# Altium PCB MP3_GIT.PcbDoc (part 2 of 2)
Units mm, origin at the board's own origin, x right, y up, seen from the top; angles counter-clockwise.
Board outline 55.37 x 101.47 mm, 4 copper layers (Top Layer, Int1 (GND), Int2 (PWR), Bottom Layer), stack 1.571 mm thick; 90 components, 60 nets, 372 pads, 171 vias.
Unrouted connection lines stored in the file: 1.
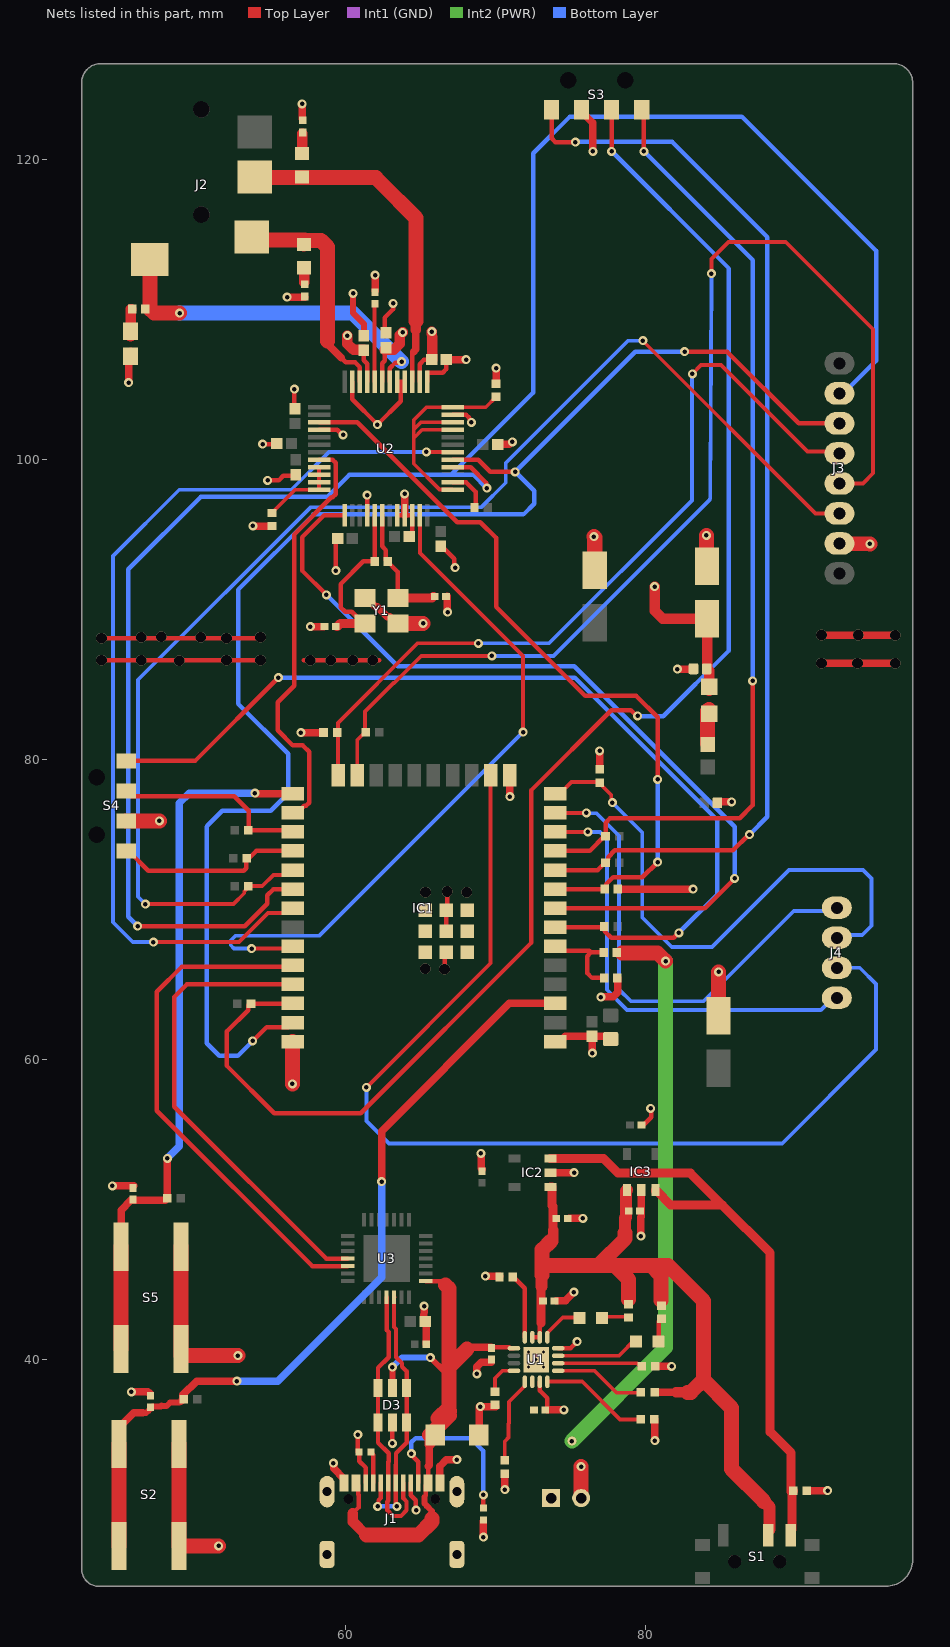
[diagram p4: the nets of this part, all layers, seen from the top]

## Via types
v1: diameter 0.6, hole 0.3, Top Layer to Bottom Layer, 140 vias
v2: diameter 0.711, hole 0.711, Top Layer to Bottom Layer, 26 vias
v3: diameter 0.5, hole 0.2, Top Layer to Bottom Layer, tented top, 5 vias

## Nets (pads, with @x,y where several pads share a name; then routed paths per layer and width w, separated by ;. In a path a pad name is that pad's centre, name@x,y a point inside that pad or via, vN(x,y) a via of type N, cw(c..) or ccw(c..) an arc to the next point about the centre after c; other vN are vias at no path point) (continued)
+5V: C8.1 D3.5 D4.1 J1.A4_B9 J1.B4_A9 U1.13 U3.8 | length 40.3
  Top Layer w0.286: 60.477,29.743 60.872,30.138 60.872,30.982 60.85,31.004 60.85,31.624 J1.A4_B9@60.694,31.781
  Top Layer w0.3: 65.259,30.836 65.344,30.921 65.344,31.631 J1.B4_A9@65.494,31.781 65.507,31.794 65.507,32.893 ; U3.8@65.328,45.236 66.397,45.236 66.675,44.958 ; C8.1@69.698,40.81 70.9,40.81 70.955,40.755 U1.13@71.22,40.755
  Top Layer w0.4: D3.5@63.119,38.107 v1(63.119,39.497) ; 65.259,30.836 65.259,30.413 65.41,30.262 65.41,30.254 65.761,29.903 65.761,29.413 ; v1(65.659,40.132) 66.599,39.192 ; 66.777,36.957 66.904,36.83
  Top Layer w0.5: 65.507,32.893 65.565,32.951 65.565,34.615 D4.1@65.604,34.654 ; D4.1@65.897,35.533 65.903,35.526 D4.1@65.903,34.517 ; 68.097,40.691 cw(c68.421,40.31) 68.42,40.81 C8.1@69.698,40.81
  Top Layer w0.7: 60.477,29.743 60.477,29.21 61.392,28.296 ; D4.1@65.602,34.356 D4.1@65.602,34.966
  Top Layer w1: 61.392,28.296 64.846,28.296 65.761,29.21 65.761,29.413 ; D4.1@65.604,34.966 66.925,36.287 ; 66.163,36.089 66.904,36.83 66.904,39.497 ; 66.296,35.956 66.925,36.585 ; 66.675,44.958 66.904,44.729 66.904,39.497 ; 68.097,40.691 66.904,39.497
  Bottom Layer w0.4: v1(63.119,39.497) 63.122,39.497 63.757,40.132 v1(65.659,40.132)
+AVDD: C10.2 C12.2 C13.2 C14.1 C15.2 R12.2 U2.38 U2.43 U2.45 | length 22.4
  Top Layer w0.3: C13.2@61.214,107.297 61.214,106.591 61.437,106.367 U2.45@61.437,105.161 ; U2.43@62.437,105.161 62.437,106.392 62.611,106.566 C15.2@62.611,107.297 ; U2.38@64.937,105.161 64.937,106.339 65.228,106.629 C12.2@65.768,106.629
  Top Layer w0.7: v1(60.122,108.229) 60.122,107.707 60.532,107.297 C13.2@61.214,107.297 ; C15.2@62.611,107.297 63.217,107.297 63.602,107.681 63.602,108.253 v1(63.8,108.452) ; v1(65.761,108.509) 65.768,107.987 cw(c65.068,107.978) 65.768,107.978 C12.2@65.768,106.629 ; v1(80.602,91.503) 80.594,91.496 80.594,89.891 81.125,89.36 C14.1@84.099,89.36 84.099,86.03 84.226,85.903 R12.2@84.226,84.574
+VBAT: C11.1 P1.1 R18.2 U1.2 | length 37.7
  Top Layer w1: 78.41,67.081 80.797,67.081 v1(81.331,66.548)
  Int2 (PWR) w1: v1(75.082,34.569) 81.331,40.818 v1(81.331,66.548)
+VOUT: C7.1 C27.1 C28.1 IC2.1 IC3.1 R4.2 R6.2 R10.1 S1.2 U1.10 U1.11 | length 54.4
  Top Layer w0.3: U1.11@72.445,41.48 U1.10@72.945,41.48 72.945,42.44
  Top Layer w0.5: R10.1@80.662,37.821 82.042,37.821
  Top Layer w0.6: 73.041,42.434 73.041,44.847 73.05,44.856 ; IC2.1@73.666,51.501 73.741,51.501 73.766,51.476 73.766,50.276 73.83,50.212 73.83,48.624 73.838,48.616
  Top Layer w0.7: 73.685,47.904 73.838,48.057 73.838,48.616 ; 82.042,37.821 82.779,37.821
  Top Layer w0.8: 73.05,44.856 73.05,45.593 73.101,45.644 ; 78.638,48.438 78.638,49.438 78.68,49.479 78.68,51.226 IC3.1@78.755,51.302 ; 87.867,30.56 88.253,30.173 S1.2@88.253,28.674
  Top Layer w1: 73.101,45.644 73.101,46.279 ; 73.685,47.904 73.101,47.32 73.101,46.279 ; 78.638,48.438 78.638,48.057 76.86,46.279 ; 78.867,43.993 78.867,45.339 77.927,46.279 ; 81.026,43.942 81.026,45.593 80.34,46.279 ; 82.779,37.821 83.007,37.821 83.845,38.659 ; 87.867,30.56 87.867,30.574 85.725,32.715 85.725,36.779 83.845,38.659 ; 73.101,46.279 76.86,46.279 ; 76.86,46.279 77.927,46.279 ; 77.927,46.279 80.34,46.279 ; 80.34,46.279 81.483,46.279 83.845,43.917 83.845,38.659
AUDIO_GBUF: J2.1 R25.2 U2.42 | length 23.4
  Top Layer w0.3: U2.42@62.937,105.161 62.937,106.056 63.326,106.445 63.671,106.445 v1(63.729,106.502)
  Top Layer w1: J2.1@46.944,113.307 46.965,113.286 46.965,110.007 47.244,109.728 v1(48.946,109.728)
  Bottom Layer w1: v1(48.946,109.728) 60.503,109.728 v1(63.729,106.502)
AUDIO_LEFT: J2.2 R27.1 U2.46 | length 15.6
  Top Layer w0.3: 59.715,106.756 60.02,106.451 60.63,106.451 60.937,106.144 U2.46@60.937,105.161
  Top Layer w0.5: 58.801,107.874 58.801,107.671 59.715,106.756
  Top Layer w0.7: J2.2@53.744,114.807 J2.2@53.957,114.593 ; R27.1@57.196,114.212 R27.1@57.221,114.187
  Top Layer w1: J2.2@53.957,114.593 R27.1@57.252,114.593 ; R27.1@57.277,114.568 58.37,114.568 58.801,114.137 58.801,107.874
AUDIO_RIGHT: J2.3 R26.1 U2.39 | length 22.9
  Top Layer w0.3: U2.39@64.437,105.161 64.437,107.064 64.533,107.16
  Top Layer w0.5: 64.533,107.16 64.694,107.321 64.694,108.636
  Top Layer w0.7: 64.694,108.636 64.694,109.22
  Top Layer w1: J2.3@53.944,118.807 53.993,118.757 57.15,118.757 62.015,118.757 62.308,118.464 64.694,116.078 64.694,109.22
BAT_LEVEL: IC1.6 R18.1 R20.2 | length 6.1
  Top Layer w0.3: IC1.6@73.973,67.542 74.273,67.242 76.242,67.242 76.352,67.132 ; R18.1@77.191,67.132 76.352,67.132 ; R20.2@77.221,65.43 76.429,65.43 76.098,65.761 76.098,66.878 76.352,67.132
BOOT: C34.1 IC1.25 R34.1 S5.1 S5.3 | length 47.2
  Top Layer w0.5: S5.3@45.041,47.52 45.041,49.959 45.695,50.613 47.983,50.613 48.066,50.695 48.066,50.698 48.114,50.747 48.114,53.397 v1(48.133,53.416) ; v1(53.95,77.749) 53.977,77.749 54.024,77.702 IC1.25@56.473,77.702
  Top Layer w1: S5.1@45.041,40.72 S5.3@45.041,47.52
  Bottom Layer w0.5: v1(48.133,53.416) 48.92,54.204 48.92,77.089 49.581,77.749 v1(53.95,77.749)
GND: C1.1 C2.2 C3.1 C4.1 C5.1 C6.1 C7.2 C8.2 C9.1 C10.1 C11.2 C12.1 C13.1 C14.2 C15.1 C16.1 C17.1 C18.2 C19.1 C20.2 C21.2 C22.2 C23.1 C24.1 C25.1 C26.2 C27.2 C28.2 C29.2 C30.2 C31.1 C32.1 C33.2 C34.2 D3.2 D4.2 IC1.1 IC1.15 IC1.38 IC1.39 IC1.40 IC1.41 IC1.42 IC1.43 IC1.44 IC1.45 IC1.46 IC1.47 IC2.2 IC3.2 J1.A1_B12 J1.A8 J1.B1_A12 J1.B8 J1.SH1 J1.SH2 J1.SH3 J1.SH4 J3.2 P1.2 R1.2 R2.1 R3.1 R5.1 R8.1 R9.1 R11.2 R13.2 R14.1 R15.1 R16.1 R19.1 R20.1 R24.2 S2.2 S2.4 S3.C1 S4.C1 S5.2 S5.4 U1.3 U1.8 U1.17 U2.4 U2.16 U2.20 U2.21 U2.22 U2.35 U2.37 U2.40 U2.41 U2.47 Y1.2 Y1.4 | length 188.9
  Top Layer w0.3: v2@43.612,88.062 v2(43.739,88.062) v2(52.07,88.062) v2@54.331,88.062 ; v2(43.739,86.614) v2(46.38,86.614) v2(52.07,86.614) v2(54.331,86.614) ; v1(54.467,101.013) 55.19,101.013 C25.1@55.19,101.027 ; v1(54.813,98.589) 54.828,98.604 55.563,98.604 55.856,98.897 C4.1@56.667,98.897 ; C3.1@56.591,103.211 v1(56.591,104.673) ; 57.226,86.614 62.255,86.614 ; U2.4@58.237,101.961 59.437,101.961 59.773,101.625 v1(59.842,101.625) ; v1(59.355,92.583) 59.355,94.507 59.504,94.697 C24.1@59.519,94.717 ; U2.47@60.437,105.161 60.437,104.002 v1(62.128,102.311) 63.687,103.87 63.687,105.161 ; R5.1@60.809,33.835 60.813,33.839 60.813,34.999 v1(60.817,35.003) ; R5.1@60.817,33.835 R5.1@60.903,33.749 ; R5.1@60.919,33.747 60.919,33.23 61.344,32.806 J1.B8@61.344,31.781 ; U2.16@61.437,96.261 61.437,97.607 v1(61.443,97.612) ; C15.1@62.611,108.197 62.597,108.211 62.597,109.434 63.17,110.007 v1(63.17,110.388) ; v1(63.119,34.417) D3.2@63.119,35.807 ; U2.20@63.437,96.261 U2.21@63.937,96.261 U2.22@64.437,96.261 64.437,95.054 C23.1@64.346,94.844 ; U2.41@63.437,105.161 63.687,105.161 ; U2.40@63.937,105.161 63.687,105.161 ; J1.A8@64.344,31.781 64.344,30.967 64.68,30.63 64.68,30.002 v1(64.71,29.972) ; U2.37@65.437,105.161 65.437,105.761 66.469,105.761 66.72,106.012 66.72,106.629 C12.1@66.72,106.647 ; C6.1@66.345,94.241 66.37,94.241 67.253,93.358 67.253,92.834 v1(67.31,92.777) ; v2(66.599,66.015) 66.599,67.008 IC1.46@66.723,67.132 ; IC1.39@66.723,68.532 IC1.43@66.723,69.932 66.777,69.986 v2(66.777,71.196) ; U2.35@67.137,102.961 68.032,102.961 68.237,102.756 68.237,102.685 68.387,102.535 v1(68.387,102.454) ; U1.3@72.945,38.53 72.955,38.52 72.955,37.916 73.431,37.44 C11.2@73.431,36.652 ; U1.8@74.17,40.755 74.994,40.755 v1(75.438,41.199) ; C29.2@79.842,55.626 80.366,56.15 80.366,56.709 v1(80.331,56.744)
  Top Layer w0.4: v1(60.503,111.049) 60.503,109.728 61.214,109.017 C13.1@61.214,108.237 C13.1@61.214,108.197
  Top Layer w0.5: v1@44.45,51.562 v1(44.459,51.571) 44.467,51.579 C34.2@45.898,51.579 ; v1(45.542,105.105) 45.542,106.54 C30.2@45.669,107.196 ; v1(45.729,37.855) 46.825,37.855 46.882,37.797 46.904,37.797 46.99,37.711 C33.2@46.99,37.69 ; v1(53.823,95.555) 53.835,95.542 55.08,95.542 R16.1@55.093,95.529 ; v1(56.109,110.795) 56.112,110.799 57.273,110.799 C31.1@57.277,110.802 ; v1(57.023,81.788) R24.2@58.48,81.788 ; C32.1@57.099,122.674 v1(57.099,123.673) ; v1(57.658,88.849) C20.2@58.532,88.834 ; v1(59.182,33.096) 59.201,33.077 59.201,32.748 59.894,32.056 J1.A1_B12@59.894,31.781 ; Y1.2@61.282,90.766 61.382,90.766 61.982,90.166 62.119,90.166 62.775,89.51 62.939,89.51 63.382,89.066 Y1.4@63.482,89.066 ; C1.1@61.976,111.223 v1(61.976,112.266) ; v1(63.932,97.688) 63.935,97.686 63.935,96.264 U2.21@63.937,96.261 ; C19.1@65.22,42.57 v1(65.243,43.561) ; C19.1@65.298,42.545 65.369,42.474 C18.2@65.369,41.022 ; J1.B1_A12@66.294,31.781 66.294,32.893 66.718,33.317 67.392,33.317 v1(67.412,33.337) ; C12.1@66.72,106.629 v1(68.032,106.629) ; C21.2@66.779,90.856 66.791,90.844 66.791,89.826 v1(66.802,89.814) ; v1(68.758,39.04) 68.758,39.517 69.051,39.81 C8.2@69.698,39.81 ; D4.2@68.864,35.264 68.916,35.317 68.916,36.862 v1@68.936,36.881 ; v1(68.983,36.869) R9.1@69.999,36.869 ; v1(69.012,53.742) 69.031,53.723 69.031,52.747 C26.2@69.037,52.741 ; C26.2@69.088,52.668 C26.2@69.113,52.693 ; v1(69.19,28.169) R2.1@69.19,29.218 ; v1(69.317,45.568) R3.1@70.282,45.568 ; R14.1@70.028,105.049 v1(70.028,106.07) ; C5.1@70.104,100.99 C5.1@70.129,100.99 70.922,100.99 71.093,101.162 v1(71.12,101.162) ; v1(70.612,31.333) R11.2@70.612,32.339 ; IC1.15@70.938,78.952 70.94,78.95 70.94,77.523 v1(70.942,77.521) ; C11.2@73.431,36.652 v1(74.549,36.652) ; IC2.2@73.666,52.451 v1(75.235,52.451) ; IC1.1@73.973,61.192 74.273,61.192 74.632,61.551 76.454,61.551 C17.1@76.454,61.537 ; C7.2@74.041,43.917 74.676,43.917 74.676,43.94 75.209,44.474 v1(75.209,44.501) ; C27.2@74.922,49.403 v1(75.819,49.403) ; S3.C1@75.738,123.297 75.738,123.147 76.479,122.406 v1(76.479,120.513) ; C17.1@76.429,61.537 C17.1@76.454,61.537 ; v1(76.454,60.427) C17.1@76.454,61.537 ; R19.1@76.937,79.4 v1(76.937,80.569) ; v1(77.013,64.16) 77.028,64.175 77.832,64.175 78.125,64.468 R20.1@78.125,65.43 ; C16.1@77.428,61.537 C17.1@76.454,61.537 ; R15.1@78.151,71.349 v1(83.16,71.349) ; v1(79.68,48.235) 79.68,49.479 79.705,49.505 IC3.2@79.705,51.302 ; R13.2@80.615,36.017 80.617,36.015 80.617,34.597 v1(80.62,34.595) ; R8.1@80.641,39.548 v1(81.737,39.548) ; v1(82.118,86.004) 82.131,86.017 83.137,86.017 C10.1@83.149,86.03 ; C9.1@84.948,77.165 v1(85.725,77.165) ; R1.2@90.801,31.246 90.813,31.259 92.113,31.259 v1(92.126,31.271) ; v2(91.713,86.411) v2(94.113,86.411) v2(96.622,86.411) ; v2(91.713,88.29) 91.726,88.278 94.158,88.278 ccw(c94.162,88.728) 94.16,88.278 v2(96.622,88.265)
  Top Layer w1: S4.C1@45.384,75.891 47.595,75.891 v1(47.6,75.895) ; S2.4@48.914,34.388 S2.2@48.914,27.588 51.533,27.588 v1(51.537,27.584) ; S5.4@49.041,47.52 49.041,40.259 v1(52.832,40.259) ; v1(56.464,58.369) 56.473,58.378 IC1.38@56.473,61.192 ; Y1.4@63.482,89.066 63.496,89.052 v1(65.176,89.052) ; v1(75.692,32.868) 75.701,32.858 P1.2@75.701,30.771 ; v1(76.556,94.844) 76.606,94.793 C22.2@76.606,92.603 ; v1(84.049,94.92) 84.049,92.911 C14.2@84.099,92.86 ; C2.2@84.861,62.913 v1(84.861,65.837) ; J3.2@92.913,94.386 93.163,94.386 v1(94.945,94.361)
  Int1 (GND) w0.3: v3(72.695,40.005) v3(73.195,40.505)
  other v2: 65.303,66.04 65.329,71.145 68.072,71.145 48.92,86.563 57.658,86.614 59.008,86.614 60.482,86.614 61.806,86.614 46.38,88.138 50.343,88.138 54.331,88.138 47.727,88.163 94.158,88.29
  other v3: 72.195,39.505 73.195,39.505 72.195,40.505
NetC1_2: C1.2 U2.44 | length 5.1
  Top Layer w0.254: U2.44@61.937,105.161 61.937,107.013 61.934,107.016 61.934,110.223 C1.2@61.976,110.265
NetC20_1: C20.1 R17.1 U2.17 Y1.3 | length 11.6
  Top Layer w0.3: Y1.3@61.282,89.066 61.182,89.066 60.409,89.84 59.969,89.84 59.665,90.145 59.665,91.669 61.189,93.193 61.976,93.193 61.937,93.231 U2.17@61.937,96.261
  Top Layer w0.6: C20.1@59.436,88.849 59.653,89.066 Y1.3@61.282,89.066
NetC21_1: C21.1 R17.2 U2.18 Y1.1 | length 8.3
  Top Layer w0.3: U2.18@62.437,96.261 62.437,94.197 62.692,93.943 62.692,93.281 63.482,92.49 Y1.1@63.482,90.766
  Top Layer w0.6: Y1.1@63.482,90.766 65.77,90.766 C21.1@65.859,90.856
NetC30_1: C30.1 R25.1 | length 1.8
  Top Layer w0.7: C30.1@45.669,108.196 45.669,108.508 45.688,108.526 45.688,109.989 R25.1@45.706,110.007
NetC31_2: C31.2 R27.2 | length 1
  Top Layer w0.7: C31.2@57.252,111.778 R27.2@57.252,112.758
NetC32_2: C32.2 R26.2 | length 1.4
  Top Layer w0.7: R26.2@57.099,120.308 C32.2@57.099,121.674
NetD1_A: D1.A R4.1 | length 1.7
  Top Layer w0.254: D1.A@77.204,42.799 77.262,42.857 R4.1@78.867,42.857
NetD1_C: D1.C U1.9 | length 3
  Top Layer w0.254: U1.9@73.445,41.48 73.445,41.765 74.479,42.799 D1.C@75.704,42.799
NetD2_1: D2.1 R6.1 | length 1.6
  Top Layer w0.3: D2.1@80.862,41.199 80.862,42.559 81.024,42.721 R6.1@81.044,42.721
NetD2_2: D2.2 U1.7 | length 5.7
  Top Layer w0.254: U1.7@74.17,40.255 78.215,40.255 D2.2@79.362,41.402
NetJ1_A5: J1.A5 R5.2 | length 2.1
  Top Layer w0.3: R5.2@61.637,33.835 R5.2@61.645,33.835 ; R5.2@61.661,33.833 61.844,33.65 J1.A5@61.844,31.781
NetJ1_B5: J1.B5 R2.2 | length 12
  Top Layer w0.3: v1(64.389,33.731) 64.389,33.65 64.844,33.195 J1.B5@64.844,31.781 ; R2.2@69.19,30.12 v1(69.19,30.988)
  Bottom Layer w0.3: v1(64.389,33.731) 64.389,34.493 64.668,34.773 68.326,34.773 69.164,33.934 69.164,31.013 v1(69.19,30.988)
NetL1_2: L1.2 R12.1 | length 2.3
  Top Layer w1: L1.2@84.125,81.065 84.125,83.218 R12.1@84.226,83.32
NetR3_2: R3.2 U1.12 | length 4.4
  Top Layer w0.3: R3.2@71.182,45.568 71.182,45.518 71.945,44.755 U1.12@71.945,41.48
NetR7_1: R7.1 U2.26 | length 2.8
  Top Layer w0.3: U2.26@67.137,98.461 68.032,98.461 68.661,97.832 R7.1@68.661,96.799
NetR8_2: R8.2 U1.6 | length 5.6
  Top Layer w0.254: U1.6@74.17,39.755 79.428,39.755 79.633,39.549 R8.2@79.633,39.548
NetR9_2: R9.2 U1.16 | length 2.5
  Top Layer w0.254: R9.2@69.952,37.781 69.952,38.76 70.441,39.25 71.215,39.25 U1.16@71.22,39.255
NetR10_2: R10.2 U1.5 | length 6.1
  Top Layer w0.254: U1.5@74.17,39.255 76.594,39.255 78.054,37.795 79.629,37.795 R10.2@79.654,37.821
NetR11_1: R11.1 U1.1 | length 5.7
  Top Layer w0.254: R11.1@70.612,33.346 70.612,34.548 70.862,34.798 70.862,35.729 70.891,35.759 70.891,37.192 71.945,38.245 U1.1@71.945,38.53
NetR13_1: R13.1 U1.4 | length 7.2
  Top Layer w0.254: U1.4@73.445,38.53 75.77,38.53 78.283,36.017 R13.1@79.608,36.017
NetR14_2: R14.2 U2.25 U2.33 U2.34 U2.36 | length 18
  Top Layer w0.254: U2.25@67.137,97.961 67.114,97.984 66.252,97.984 64.541,99.694 64.541,101.397 ; U2.33@67.137,101.961 65.106,101.961 64.541,101.397 ; U2.34@67.137,102.461 65.021,102.461 64.541,101.981 ; R14.2@70.028,104.145 70.026,104.145 69.342,103.461 U2.36@67.137,103.461 65.386,103.461 64.541,102.616 64.541,101.981 ; 64.541,101.397 64.541,101.981
NetR16_2: R16.2 U2.9 U2.10 U2.11 U2.12 | length 5.3
  Top Layer w0.254: R16.2@55.093,96.434 55.095,96.434 56.622,97.961 U2.12@58.237,97.961 U2.11@58.237,98.461 U2.10@58.237,98.961 U2.9@58.237,99.461
ONandOFF: IC2.3 IC3.3 R1.1 S1.3 | length 41.2
  Top Layer w0.6: IC2.3@73.666,53.401 77.188,53.401 78.163,52.426 82.982,52.426 85.115,50.292 ; IC3.3@80.655,51.302 80.655,51.227 80.68,51.202 80.755,51.202 81.665,50.292 85.115,50.292 ; R1.1@89.687,31.21 89.687,33.782 88.29,35.179 88.29,47.117 85.115,50.292 ; S1.3@89.753,28.674 89.753,31.154 R1.1@89.845,31.246
RESET: C33.1 IC1.3 R23.1 S2.1 S2.3 | length 54.6
  Top Layer w0.4: 46.496,36.445 46.703,36.445 46.832,36.575 46.854,36.575 46.99,36.711 C33.1@46.99,36.732 ; C33.1@46.99,36.754 47.126,36.89 47.687,36.89 47.738,36.94 47.772,36.906 48.082,36.906 48.302,37.126 48.949,37.126 49.082,37.258 R23.1@49.082,37.262
  Top Layer w0.5: S2.3@44.914,34.388 44.914,35.488 45.871,36.445 46.496,36.445 ; R23.1@49.082,37.262 49.164,37.344 49.164,37.643 50.079,38.557 v1(52.756,38.557) ; v1(62.408,51.867) 62.408,55.22 70.92,63.732 IC1.3@73.973,63.732
  Top Layer w1: S2.1@44.914,27.588 S2.3@44.914,34.388
  Bottom Layer w0.5: v1(52.756,38.557) 55.474,38.557 62.408,45.491 v1(62.408,51.867)
RXD: IC1.34 U3.26 | length 34.7
  Top Layer w0.3: IC1.34@56.473,66.272 56.393,66.192 49.098,66.192 47.422,64.516 47.422,56.591 57.777,46.236 U3.26@60.148,46.236
SD_CS: IC1.12 J4.1 | length 29.9
  Top Layer w0.254: IC1.12@73.973,75.162 73.976,75.159 v1(76.149,75.159)
  Bottom Layer w0.254: v1(76.149,75.159) 76.962,75.159 77.419,74.701 77.419,64.643 78.765,63.297 91.673,63.297 92.485,64.11 J4.1@92.735,64.11
SD_MISO: IC1.14 J4.3 R19.2 | length 37.7
  Top Layer w0.254: IC1.14@73.973,77.702 74.273,77.702 75.057,78.486 76.844,78.486 76.937,78.393 76.94,78.393 77.709,77.625 77.709,77.181 v1(77.775,77.114)
  Bottom Layer w0.254: v1(77.775,77.114) 79.773,75.116 79.773,69.452 81.737,67.488 84.43,67.488 89.56,72.619 94.488,72.619 95.047,72.06 95.047,68.91 94.437,68.301 92.926,68.301 J4.3@92.735,68.11
SD_MOSI: IC1.16 J4.2 | length 71.1
  Top Layer w0.254: v1(61.392,58.141) 69.668,66.417 IC1.16@69.668,78.952
  Bottom Layer w0.254: v1(61.392,58.141) 61.392,55.905 62.89,54.407 89.103,54.407 95.352,60.655 95.352,65.024 94.266,66.11 J4.2@92.735,66.11
SD_SCK: IC1.13 J4.4 | length 32.5
  Top Layer w0.254: IC1.13@73.973,76.432 73.976,76.429 v1(76.048,76.429)
  Bottom Layer w0.254: v1(76.048,76.429) 76.068,76.408 76.729,76.408 78.232,74.905 78.232,64.668 79.019,63.881 83.845,63.881 89.865,69.901 92.527,69.901 J4.4@92.735,70.11
SWITCH_LEFT: IC1.7 R33.1 S4.2 | length 62.9
  Top Layer w0.3: S4.2@45.384,79.891 49.97,79.891 v1(55.524,85.446) ; IC1.7@73.973,68.812 R33.1@77.101,68.812 ; R33.1@77.278,68.828 77.278,68.529 77.697,68.11 81.863,68.11 82.188,68.436 v1(82.215,68.436)
  Bottom Layer w0.3: v1(55.524,85.446) 75.29,85.446 84.785,75.95 84.785,71.006 v1(82.215,68.436)
SWITCH_PUSH: IC1.27 R32.1 S4.T1 | length 13
  Top Layer w0.3: S4.T1@45.384,77.891 45.729,77.546 52.578,77.546 53.56,76.564 53.56,75.286 56.349,75.286 IC1.27@56.473,75.162
SWITCH_RIGHT: IC1.28 R31.1 S4.1 | length 12.5
  Top Layer w0.3: S4.1@45.384,73.891 45.534,73.891 46.857,72.568 53.216,72.568 53.392,72.744 53.392,73.234 R31.1@53.564,73.406 ; R31.1@53.564,73.41 54.047,73.892 IC1.28@56.473,73.892
TFT_CS: IC1.29 J3.3 R21.2 | length 87.6
  Top Layer w0.254: v1(46.66,70.358) 52.524,70.358 53.247,71.08 53.247,71.201 53.594,71.548 53.594,71.552 54.451,71.552 55.198,72.299 56.15,72.299 IC1.29@56.473,72.622 ; v1(79.807,107.899) 91.32,96.386 J3.3@92.913,96.386
  Bottom Layer w0.254: v1(46.66,70.358) 46.177,70.841 46.177,85.307 57.664,96.794 69.029,96.794 70.671,98.435 70.671,99.754 78.816,107.899 v1(79.807,107.899)
TFT_DC: IC1.24 J3.5 R24.1 | length 54.1
  Top Layer w0.254: IC1.24@59.508,78.952 59.487,78.973 59.487,81.788 59.487,82.423 64.795,87.732 v1(68.859,87.732) ; v1(83.109,105.689) 83.693,106.274 85.014,106.274 90.78,100.508 92.792,100.508 J3.5@92.913,100.386
  Bottom Layer w0.254: v1(68.859,87.732) 73.558,87.732 83.083,97.257 83.083,105.664 v1(83.109,105.689)
TFT_RST: IC1.23 J3.4 R22.2 | length 75.1
  Top Layer w0.254: IC1.23@60.778,78.952 60.778,81.289 61.299,81.81 61.299,81.813 61.299,83.186 63.203,85.09 63.246,85.09 65.049,86.893 v1(69.748,86.893) ; v1(84.379,112.37) 84.379,113.335 85.522,114.478 89.332,114.478 95.148,108.661 95.148,99.06 94.475,98.386 J3.4@92.913,98.386
  Bottom Layer w0.254: v1(69.748,86.893) 73.863,86.893 84.229,97.259 ccw(c84.049,97.439) 84.303,97.437 v1(84.379,112.37)
TXD: IC1.35 U3.25 | length 31.3
  Top Layer w0.3: IC1.35@56.473,65.002 49.43,65.002 48.59,64.162 48.59,56.858 58.712,46.736 U3.25@60.148,46.736
USB_D_N: D3.3 D3.4 J1.A7 J1.B7 U3.5 | length 17.5
  Top Layer w0.286: v1(62.138,30.226) 62.198,30.286 62.198,30.63 62.344,30.776 J1.B7@62.344,31.781 ; U3.5@63.238,44.146 63.233,44.141 63.233,42.167 63.364,42.036 63.364,40.162 63.762,39.763 63.762,39.525 64.069,39.218 D3.4@64.069,38.107 D3.3@64.069,35.807 64.069,34.457 63.364,33.752 63.364,32.999 63.338,32.973 63.338,31.786 J1.A7@63.344,31.781 63.344,30.391 63.424,30.311 v1(63.424,30.226)
  Bottom Layer w0.286: v1(62.138,30.226) v1(63.424,30.226)
USB_D_P: D3.1 D3.6 J1.A6 J1.B6 U3.4 | length 18.4
  Top Layer w0.286: U3.4@62.738,44.146 62.743,44.141 62.743,41.964 62.874,41.833 62.874,40.162 62.169,39.457 D3.6@62.169,38.107 D3.1@62.169,35.807 62.169,34.457 62.874,33.752 62.874,33.201 62.849,33.176 62.849,31.786 J1.A6@62.844,31.781 62.844,30.589 62.781,30.526 62.781,29.96 63.157,29.583 63.69,29.583 64.067,29.96 64.067,30.546 63.844,30.769 J1.B6@63.844,31.781
VS1053_DREQ: IC1.26 U2.8 | length 28.1
  Top Layer w0.3: IC1.26@56.473,76.432 56.773,76.432 57.243,76.902 57.368,76.902 57.573,77.107 57.573,80.497 57.145,80.924 56.49,80.924 55.474,81.94 55.474,83.795 56.576,84.897 56.576,94.981 59.056,97.461 59.132,97.461 59.337,97.666 59.337,99.756 59.132,99.961 U2.8@58.237,99.961
VS1053_XCS: IC1.33 U2.23 | length 47.1
  Top Layer w0.254: v1(53.746,67.386) 56.317,67.386 IC1.33@56.473,67.542 ; U2.23@64.937,96.261 64.959,96.239 64.959,93.759 71.831,86.886 v1(71.831,81.813)
  Bottom Layer w0.254: v1(53.746,67.386) 52.574,67.386 52.349,67.611 52.349,67.92 52.68,68.25 58.268,68.25 v1(71.831,81.813)
VS1053_XDCS: IC1.8 U2.13 | length 57.8
  Top Layer w0.3: v1(58.725,90.957) 57.099,92.583 57.099,94.793 58.567,96.261 U2.13@59.937,96.261 ; IC1.8@73.973,70.082 83.951,70.082 v1(85.928,72.06)
  Bottom Layer w0.3: v1(58.725,90.957) 63.475,86.208 75.235,86.208 85.928,75.514 v1(85.928,72.06)
VS1053_XRST: IC1.9 R15.2 U2.3 | length 50.7
  Top Layer w0.3: U2.3@58.237,102.461 60.785,102.461 67.437,95.809 68.986,95.809 70.028,94.767 70.028,90.17 75.971,84.226 79.375,84.226 80.801,82.8 v1(80.801,78.66) ; IC1.9@73.973,71.352 73.976,71.349 77.246,71.349 77.381,71.483 77.381,71.691 77.826,72.136 79.781,72.136 v1(80.797,73.152)
  Bottom Layer w0.3: v1(80.797,73.152) 80.799,73.154 v1(80.801,78.66) v1(80.801,78.66)
VSPI_MISO: IC1.31 U2.30 | length 63.4
  Top Layer w0.254: v1(47.193,67.818) 52.897,67.818 54.838,69.759 56.15,69.759 IC1.31@56.473,70.082 ; v1(65.38,100.482) 65.39,100.472 67.127,100.472 U2.30@67.137,100.461
  Bottom Layer w0.254: v1(47.193,67.818) 45.822,67.818 44.501,69.139 44.501,93.548 48.915,97.962 55.207,97.962 ; 55.208,97.962 55.727,97.962 ; 55.727,97.962 56.382,97.962 58.903,100.482 v1(65.38,100.482)
VSPI_MOSI: IC1.37 J3.6 U2.29 | length 98.9
  Top Layer w0.3: v1(53.812,61.233) 54.741,62.162 56.173,62.162 IC1.37@56.473,62.462 ; U2.29@67.137,99.961 68.84,99.961 69.639,99.162 v1(71.298,99.162) ; v1(82.601,107.163) 85.42,107.163 90.196,102.386 J3.6@92.913,102.386
  Bottom Layer w0.3: v1(53.812,61.233) 52.828,60.249 51.587,60.249 50.76,61.077 50.76,75.499 50.785,75.525 50.785,75.58 51.786,76.581 55.016,76.581 56.185,77.749 56.185,80.366 52.857,83.693 52.857,91.313 57.861,96.317 71.857,96.317 72.568,97.028 72.568,97.892 v1(71.298,99.162) 79.299,107.163 v1(82.601,107.163)
VSPI_SCK: IC1.30 J3.7 U2.28 | length 127.6
  Top Layer w0.3: v1(46.152,68.885) 53.289,68.885 54.788,70.383 54.788,70.942 55.198,71.352 IC1.30@56.473,71.352 ; U2.28@67.137,99.461 68.337,99.461 69.361,98.437 69.361,98.127 v1(69.418,98.069)
  Bottom Layer w0.3: v1(46.152,68.885) 45.517,69.52 45.517,92.659 50.343,97.485 55.01,97.485 55.925,97.485 58.786,97.485 60.259,98.958 67.031,98.958 ; v1(69.418,98.069) 68.529,98.958 67.031,98.958 ; J3.7@92.913,104.386 93.185,104.386 95.352,106.553 95.352,113.894 86.411,122.834 74.955,122.834 72.517,120.396 72.517,104.445 67.031,98.958
VSWITCH_LEFT: IC1.11 R30.1 S3.2 | length 64.3
  Top Layer w0.3: IC1.11@73.973,73.892 76.262,73.892 77.246,74.876 77.246,74.879 77.329,74.962 77.329,75.78 77.621,76.073 86.258,76.073 87.122,76.937 87.122,85.221 v1(87.127,85.226) ; v1@79.868,120.532 S3.2@79.868,123.168
  Top Layer w0.5: S3.2@79.738,123.297 S3.2@79.868,123.168 ; v1@79.868,120.532 v1(79.887,120.513)
  Bottom Layer w0.3: v1(79.887,120.513) 87.127,113.273 v1(87.127,85.226)
VSWITCH_PUSH: IC1.36 R29.1 S3.T1 | length 100.7
  Top Layer w0.3: IC1.36@56.473,63.732 56.458,63.718 53.604,63.718 53.507,63.621 53.507,63.286 52.095,61.874 52.095,59.567 55.238,56.424 61.021,56.424 72.39,67.793 72.39,77.953 77.699,83.261 79.019,83.261 79.385,82.895 v1(79.466,82.895) ; v1(77.738,120.513) 77.738,123.261 S3.T1@77.757,123.279
  Bottom Layer w0.3: v1(77.738,120.513) 85.547,112.704 85.547,87.249 81.178,82.88 79.481,82.88 v1(79.466,82.895)
VSWITCH_RIGHT: IC1.10 R28.1 S3.1 | length 73.4
  Top Layer w0.3: S3.1@73.736,123.295 73.736,121.387 73.99,121.133 v1(75.311,121.133) ; IC1.10@73.973,72.622 76.796,72.622 77.271,73.098 77.271,73.101 77.271,73.105 77.496,73.329 77.496,73.482 77.944,73.931 85.818,73.931 86.868,74.981 v1(86.919,74.981)
  Bottom Layer w0.3: v1@75.288,121.163 cw(c75.294,120.863) 75.294,121.163 81.758,121.163 88.113,114.808 88.113,76.175 v1(86.919,74.981)
pads on no net: IC1.4 IC1.5 IC1.17 IC1.18 IC1.19 IC1.20 IC1.21 IC1.22 IC1.32 IC2.4 IC3.4 J1. J2. J2.4 S1. S1.1 S1.SH1 S1.SH2 S1.SH3 S1.SH4 S3.MH1 S3.MH2 S4.MH1 S4.MH2 U1.14 U1.15 U2.1 U2.2 U2.15 U2.27 U2.48 U3.1 U3.2 U3.3 U3.9 U3.10 U3.11 U3.12 U3.13 U3.14 U3.15 U3.16 U3.17 U3.18 U3.19 U3.20 U3.21 U3.22 U3.23 U3.24 U3.27 U3.28 U3.29

## Polygon pours and split planes (outlines as drawn)
+3V3 on Int2 (PWR) "+3V3" (solid, remove dead copper, pour order 2): 90.703,108.356 90.068,108.991 88.544,108.991 87.96,108.407 87.96,74.981 87.097,74.117 82.88,74.117 80.264,71.501 80.264,73.609 83.21,76.556 83.21,77.572 82.982,77.8 82.042,77.8 81.737,77.495 81.737,76.683 80.264,75.209 80.264,81.102 77.8,83.566 77.8,87.427 77.622,87.605 75.717,87.605 75.413,87.3 75.413,84.887 74.981,84.455 53.594,84.455 50.546,81.407 50.546,37.033 50.978,36.601 51.714,36.601 51.994,36.881 51.994,79.705 55.016,82.728 75.794,82.728 78.588,79.934 78.588,60.173 76.454,58.039 68.656,58.039 66.37,55.753 66.37,51.791 66.37,40.488 65.456,39.573 64.16,39.573 63.856,39.268 63.856,38.659 64.16,38.354 65.837,38.354 68.148,40.665 68.148,55.651 68.961,56.464 77.572,56.464 80.264,59.157 80.264,69.301 83.676,72.746 88.189,72.746 90.703,74.85
+AVDD on Int2 (PWR) "+AVDD" (solid, pour order 5): 79.832,90.627 80.035,90.424 81.255,90.424 81.458,90.627 81.458,98.374 70.383,109.449 59.385,109.449 58.953,109.017 58.953,108.306 59.461,107.798 69.672,107.798 79.832,97.638
+VBAT on Top Layer "+VBAT" (solid, pour order 0): 74.549,32.893 75.946,34.29 75.946,34.798 75.184,35.56 74.93,35.56 74.066,34.696 73.736,34.696 72.923,35.509 72.923,37.465 72.669,37.719 72.669,38.557 72.212,38.557 72.212,37.922 71.679,37.389 71.679,34.773 71.984,34.468 71.984,30.328 72.593,29.718 74.219,29.718 74.549,30.048
GND on Top Layer "GND" (solid, pour order 9): 65.024,64.618 67.386,64.618 69.24,66.472 69.24,71.933 68.275,72.898 65.176,72.898 63.83,71.552 63.83,65.811
GND on Int1 (GND) "GND" (solid, pour order 10): 43.18,27.813 45.593,25.4 94.869,25.4 97.155,27.686 97.155,123.444 94.869,125.73 45.212,125.73 43.18,123.698 43.18,101.854

## Silkscreen, mask and mechanical layers (free items; w line width, h text height)
Top Overlay:
  lines w0.254: 42.545,87.122 97.663,87.122 ; 42.545,87.579 97.663,87.579
  text "VOLUME" at 70.514,120.113 h1 r90
  text "ANALOG" at 96.596,112.065 h2 r90
  text "LED" at 94.813,106.015 h1
  text "SCK" at 94.84,103.984 h1
  text "SI" at 95.12,101.775 h1
  text "DC" at 95.12,99.819 h1
  text "RST" at 94.967,97.838 h1
  text "CS" at 94.917,95.704 h1
  text "GND" at 94.866,92.808 h1
  text "3V3" at 91.691,88.998 h1
  text "SCK" at 94.84,69.72 h1
  text "SO" at 95.094,67.535 h1
  text "SI" at 95.221,65.427 h1
  text "PlayBack" at 44.044,63.344 h1 r90
  text "CS" at 95.044,63.192 h1
  text "RX" at 46.504,59.484 h1
  text "TX" at 47.723,57.452 h1
  text "BOOT" at 54.508,41.25 h1.52 r90
  text "D+" at 60.017,39.197 h1
  text "D-" at 65.478,37.157 h1
  text "DIGITAL" at 96.393,31.115 h2 r90
  text "RESET" at 53.746,26.187 h1.52 r90

## Text inside footprints (layer, text, board x,y; h text height)
J1: Top 3D Body "PCB EDGE" at 68.494,24.526 h0.41
U2: Top Overlay "48" at 58.681,104.717 h0.61; Top Overlay "37" at 65.69,104.715 h0.61; Top Overlay "36" at 66.692,103.714 h0.61; Top Overlay "25" at 66.693,96.955 h0.61; Top Overlay "24" at 65.69,95.707 h0.61; Top Overlay "13" at 58.682,95.705 h0.61; Top Overlay "12" at 57.678,96.954 h0.61